# EAGLE board Production (EAGLE 6.5.0)
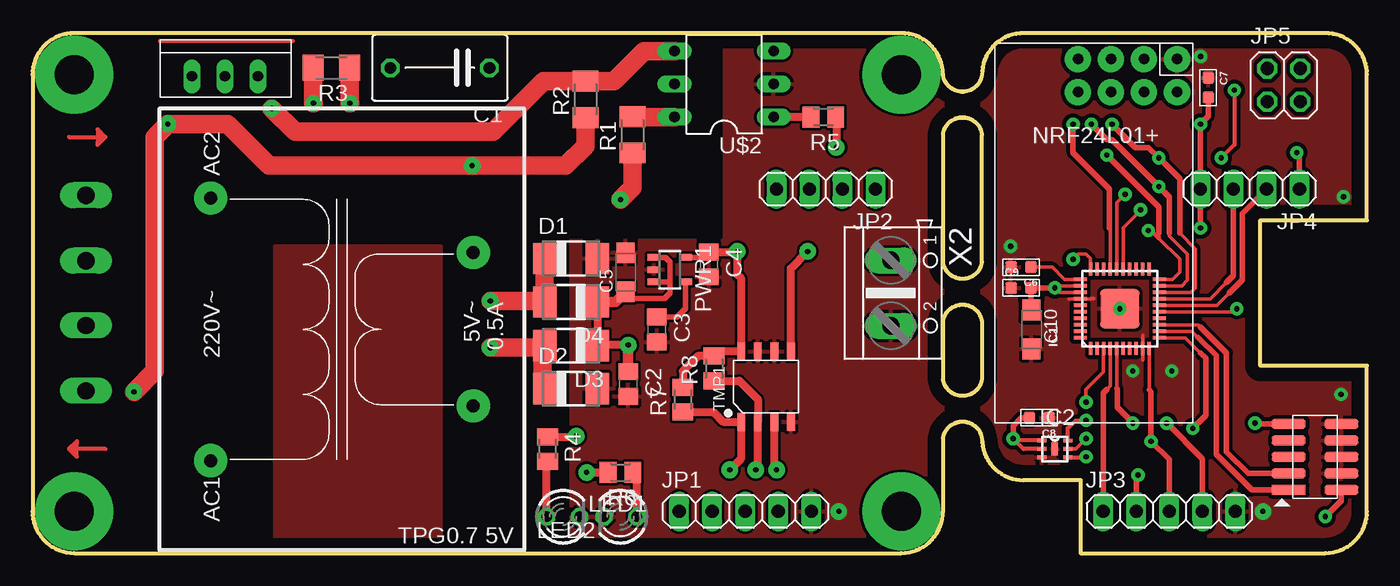
[diagram p0: board, top side]
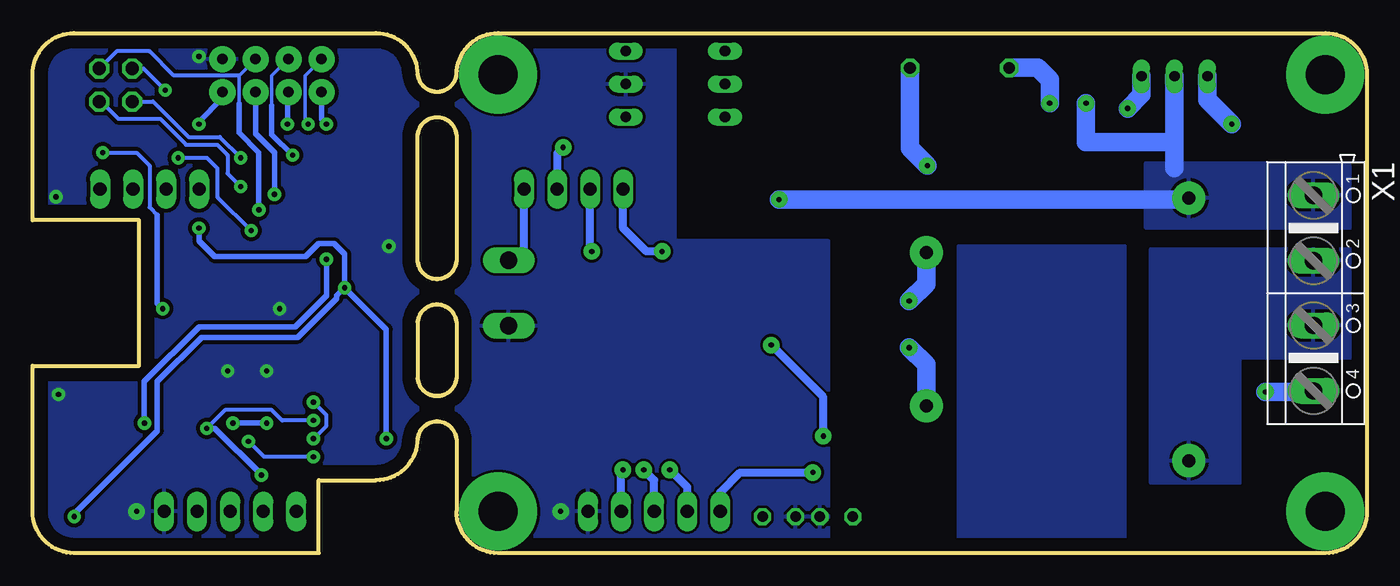
[diagram p1: board, bottom side, seen from below]

Size 102.6 x 40 mm. Coordinates in mm from the lower left corner, seen from the top.
Outline: 3.2,0 66.8,0 arc90 70,3.2 70,8.8 arc-165 73,8.8 arc90 76.2,5.6 80.6,5.6 80.6,0 99.4,0 arc90 102.6,3.2 102.6,14.4 94.4,14.4 94.4,25.6 102.6,25.6 102.6,36.8 arc90 99.4,40 76.2,40 arc90 73,36.8 arc-165 70,36.8 arc90 66.8,40 3.2,40 arc90 0,36.8 0,3.2 arc90 3.2,0
Outline: 70,17.8 arc-165 73,17.8 73,13.4 arc-165 70,13.4 70,17.8
Outline: 73,22.4 arc-165 70,22.4 70,32.2 arc-165 73,32.2 73,22.4
Copper layers (1*16): Top 0.035mm / dielectric 1.5mm / Bottom 0.035mm
Design rules "default": minimum track width 10mil, minimum drill 24mil, track to track 8mil, track to pad 8mil, pad to pad 8mil, via to via 8mil, smd to smd 8mil, copper to edge 40mil, drill to drill 8mil, minimum pad ring 10mil, minimum via ring 8mil, stop-mask expansion 4mil, vias tented up to drill 0mil, thermal gap 10mil

## Footprints (pad centres in the part's own frame; a part is rotated, then mirrored left to right if it is on the bottom)
C075-052X106 = drill 0.914 octagon: 1 -3.81,0; 2 3.81,0
C0805 = smd 1.3 x 1.5: 1 -0.95,0; 2 0.95,0
SMC_A = smd 1.6 x 1.4: + -1.5,0; - 1.5,0
C0603 = smd 0.889 x 0.889: 1 0,0.762; 2 0,-0.762
DO-214AC = smd 1.8 x 2.4: A 2.025,0; C -2.025,0
QFN40-LONG = smd 1 x 0.26: 1 -3.05,2.25; 2 -3.05,1.75; 3 -3.05,1.25; 4 -3.05,0.75; 5 -3.05,0.25; 6 -3.05,-0.25; 7 -3.05,-0.75; 8 -3.05,-1.25; 9 -3.05,-1.75; 10 -3.05,-2.25; 21 3.05,-2.25; 22 3.05,-1.75; 23 3.05,-1.25; 24 3.05,-0.75; 25 3.05,-0.25; 26 3.05,0.25; 27 3.05,0.75; 28 3.05,1.25; 29 3.05,1.75; 30 3.05,2.25 | smd 0.26 x 1: 11 -2.25,-3.05; 12 -1.75,-3.05; 13 -1.25,-3.05; 14 -0.75,-3.05; 15 -0.25,-3.05; 16 0.25,-3.05; 17 0.75,-3.05; 18 1.25,-3.05; 19 1.75,-3.05; 20 2.25,-3.05; 31 2.25,3.05; 32 1.75,3.05; 33 1.25,3.05; 34 0.75,3.05; 35 0.25,3.05; 36 -0.25,3.05; 37 -0.75,3.05; 38 -1.25,3.05; 39 -1.75,3.05; 40 -2.25,3.05 | smd 3 x 3: 41 0,0
USON6 = smd 0.7 x 0.3: 1 -1,0.65; 2 -1,0; 3 -1,-0.65; 4 1,-0.65; 5 1,0; 6 1,0.65 | smd 0.5 x 1: EPAD 0,0
H2X5-SMD-1.27 = smd 0.74 x 2.6: 1 -2.54,2.025; 2 -2.54,-2.025; 3 -1.27,2.025; 4 -1.27,-2.025; 5 0,2.025; 6 0,-2.025; 7 1.27,2.025; 8 1.27,-2.025; 9 2.54,2.025; 10 2.54,-2.025
1X05 = drill 1.016 long: 1 -5.08,0; 2 -2.54,0; 3 0,0; 4 2.54,0; 5 5.08,0
1X04 = drill 1.016 long: 1 -3.81,0; 2 -1.27,0; 3 1.27,0; 4 3.81,0
2X02 = drill 1.016 octagon: 1 -1.27,-1.27; 2 -1.27,1.27; 3 1.27,-1.27; 4 1.27,1.27
LED3MM = drill 0.813 octagon: A -1.27,0; K 1.27,0
SOT23-5 = smd 0.5 x 1: 1 -0.95,-1.2; 2 0,-1.2; 3 0.95,-1.2; 4 0.95,1.2; 5 -0.95,1.2
M1206 = smd 1.6 x 2: 1 -1.4,0; 2 1.4,0
M0805 = smd 1.3 x 1.6: 1 -0.95,0; 2 0.95,0
SOIC8-1.27-5X4MM = smd 0.6 x 1.4: 1 -1.905,-2.7; 2 -0.635,-2.7; 3 0.635,-2.7; 4 1.905,-2.7; 5 1.905,2.7; 6 0.635,2.7; 7 -0.635,2.7; 8 -1.905,2.7
TPG-0.7-5V = drill 1 pad 2.54: AC1 6.9,-3.9; AC2 27.1,-3.9; DC1 11.1,-24.1; DC2 22.9,-24.1
DIL06 = drill 0.813 long: 1 -2.54,-3.81; 2 0,-3.81; 3 2.54,-3.81; 4 2.54,3.81; 5 0,3.81; 6 -2.54,3.81
TO220NORM = drill 0.8 long: GATE 2.54,0; MT1 -2.54,0; MT2 0,0
NRF = drill 0.8 pad 2: CE 3.74,1.2; CSN 3.74,3.74; GND 1.2,1.2; IRQ 8.82,3.74; MISO 8.82,1.2; MOSI 6.28,3.74; SCK 6.28,1.2; VCC 1.2,3.74
AK500/4 = drill 1.321 long: 1 -7.518,0; 2 -2.489,0; 3 2.489,0; 4 7.518,0
AK500/2 = drill 1.321 long: 1 -2.515,0; 2 2.515,0

## Placement (x,y rotation side)
C1  [C075-052X106]  31.32,37.32 180 top
C2  [C0805]  45.8,13 270 top
C3  [C0805]  48,17.2 270 top
C4  [C0805]  52,22.2 270 top
C5  [SMC_A]  45.6,21.6 90 top
C6  [C0603]  76,22 270 top
C7  [C0603]  90.4,35.8 0 top
C8  [C0603]  77.4,10.4 270 top
C9  [C0603]  76,20.4 90 top
C10  [SMC_A]  76.8,17.2 270 top
D1  [DO-214AC]  41.4,22.65 0 top
D2  [DO-214AC]  41.4,12.65 0 top
D3  [DO-214AC]  41.4,15.95 180 top
D4  [DO-214AC]  41.4,19.32 180 top
IC1  CY8C4245-LQI-LONG  [QFN40-LONG]  83.6,18.8 90 top
IC2  OPT3001  [USON6]  78.6,8 0 top
J1  2x5p-1.27  [H2X5-SMD-1.27]  98.6,7.4 90 top
JP1  [1X05]  54.8,3.2 0 top
JP2  [1X04]  61,28 180 top
JP3  [1X05]  87.4,3.2 0 top
JP4  [1X04]  93.6,28 180 top
JP5  [2X02]  96.2,36 0 top
LED1  [LED3MM]  40.8,2.8 0 top
LED2  [LED3MM]  45.2,2.8 180 top
PWR1  LP2992  [SOT23-5]  49,21.8 270 top
R1  [M1206]  46.12,32.18 90 top
R2  [M1206]  42.52,34.9 90 top
R3  [M1206]  22.98,37.32 180 top
R4  [M0805]  39.6,8 270 top
R5  [M0805]  60.8,33.54 180 top
R6  [M0805]  45.2,6.2 180 top
R7  [M0805]  50,11.8 90 top
R8  [M0805]  52.4,14.2 90 top
TMP1  LM92  [SOIC8-1.27-5X4MM]  56.4,12.8 0 top
U$1  ТПГ-0.7-5V  [TPG-0.7-5V]  9.79,0.21 90 top
U$2  MOC3043  [DIL06]  53.17,36.08 90 top
U$3  BTB16  [TO220NORM]  14.8,36.68 0 top
U$4  NRF24  [NRF]  89.2,39.2 180 top
X1  [AK500/4]  4.11,20 270 bottom
X2  [AK500/2]  65.99,20 270 top

## Library data of the parts
C1-C5 C10 R1-R8 = rcl
C6-C9 = My_RLC
D1-D4 = diode
IC1 = PsoC
IC2 PWR1 TMP1 = My_TI
J1 = Seeed-OPL-Connector; MPN: F243-1109A0BMUB2
JP1-JP5 = pinhead
LED1 LED2 = led
U$1 = Trasformators
U$2 = OpticalSwitch
U$3 = Semistors
U$4 = NRF24l01+
X1 X2 = con-ptr500; OC_FARNELL: unknown; OC_NEWARK: unknown

## Nets
+5V: C4.1 JP2.4 PWR1.5 R7.2 R8.2 TMP1.8
+5V1: C7.2 C8.2 C9.2 C10.+ IC1.32 IC1.33 IC2.1 IC2.2 J1.2 JP4.4 U$4.VCC
BUTTON: IC1.15 JP4.1
CE: IC1.25 JP5.4 U$4.CE
CRIT_TEMP: IC1.5 JP3.4
CSN: IC1.26 U$4.CSN
GND: C2.2 C3.2 C4.2 C5.- D1.A D2.A JP1.5 LED1.K LED2.K PWR1.2 TMP1.4 TMP1.6 TMP1.7 U$2.2 X2.2
GND1: C6.2 C7.1 C8.1 C9.1 C10.- IC1.9 IC1.34 IC1.41 IC2.3 IC2.EPAD J1.4 J1.6 J1.8 J1.10 JP3.5 U$4.GND
IRQ: IC1.27 U$4.IRQ
LED: IC1.4 JP3.1
LOAD: JP2.2 R5.1
LOAD1: IC1.16 JP4.2
MOSI: IC1.18 JP5.1 U$4.MOSI
N$1: U$1.AC1 X1.2 X1.3
N$2: R1.1 R3.2 U$1.AC2 U$3.MT2 X1.1
N$3: D1.C D4.A U$1.DC2
N$4: D2.C D3.A U$1.DC1
N$8: R1.2 U$2.6
N$9: R2.2 U$2.4 U$3.GATE
N$10: C1.1 R2.1 U$3.MT1 X1.4
N$11: C1.2 R3.1
N$13: LED1.A R4.2
N$14: R5.2 U$2.1
N$16: C3.1 PWR1.4
N$17: JP1.1 R6.2
N$18: LED2.A R6.1
N$19: JP1.2 R7.1 TMP1.1
N$20: JP1.3 R8.1 TMP1.2
N$21: JP1.4 TMP1.3
N$23: JP2.1 X2.1
N$24: C6.1 IC1.31
N$25: IC1.12 J1.1
N$26: IC1.13 J1.3
NISO: IC1.19 JP5.3 U$4.MISO
OPT_IRQ: IC1.3 IC2.5
RESET: IC1.30 J1.9
SCL: IC1.10 IC2.4 JP3.3
SCLK: IC1.20 JP5.2 U$4.SCK
SDA: IC1.11 IC2.6 JP3.2
TEMP_INT: JP2.3 TMP1.5
TEMP_INT1: IC1.17 JP4.3
VCC: C2.1 C5.+ D3.C D4.C PWR1.1 PWR1.3 R4.1

## Tracks (layer width: path | path; a pad name or v marks a point on that pad's centre or on a via)
+5V  (via drill 0.4 pad 1.27)
  Top 0.406: PWR1.5 51.6,22.75 C4.1
  Top 0.61: C4.1 54.15,23.15 v54.2,23.2 54.2,21.4 54.49,21.11 TMP1.8 52.75,15.5 R8.2 51.15,15.15 50,14 R7.2
  Bottom 0.61: v54.2,23.2 55.4,23.2 57.19,24.99 JP2.4
+5V1  (via drill 0.4 pad 1.02)
  Top 0.254: IC1.32 78.75,20.55 v78.6,20.4 78.95,20.05 IC1.33
  Top 0.305: IC2.1 75.55,8.65 v75.4,8.8 76.2,8 IC2.2
  Top 0.406: 100.6,4.83 J1.2 100.62,4.03 v99.4,2.8 | v89.8,25 v89.79,25.01 JP4.4 v89.8,33 90.4,33.6 C7.2 | v78.6,20.4 C9.2 76.76,18.74 C10.+ | C8.2 76,10.4 75.4,9.8 v75.4,8.8
  Bottom 0.406: v75.4,8.8 75.4,17.2 v78.6,20.4 | v78.6,20.4 78.6,23 79.4,23.8 80.6,23.8 81.6,22.8 88.6,22.8 89.8,24 v89.8,25 | v99.4,2.8 99.4,3 93,9.4 93,13.2 89.6,16.6 82.2,16.6 79.2,19.6 79.2,19.8 v78.6,20.4 | U$4.VCC 88,35 89.8,33.2 v89.8,33
BUTTON  (via drill 0.4 pad 1.02)
  Top 0.254: v92.6,18.8 92.35,18.55 IC1.15
  Top 0.406: JP4.1 97.41,30.59 v97.2,30.8
  Bottom 0.305: v97.2,30.8 94.6,30.8 93.6,29.8 93.6,26.6 93,26
  Bottom 0.406: 93,26 93,19.2 v92.6,18.8
CE  (via drill 0.4 pad 1.02)
  Top 0.254: IC1.25 83.85,25.05 v85.2,26.4
  Bottom 0.254: 86.73,34.55 86.73,36.73 U$4.CE
  Bottom 0.305: 86.73,36.73 91.73,36.73 93.6,38.6 96.14,38.6 JP5.4
  Bottom 0.406: v85.2,26.4 85.2,30.8 86.73,32.33 86.73,34.55
CRIT_TEMP  (via drill 0.4 pad 1.02)
  Top 0.254: 83.35,12.65 IC1.5
  Top 0.406: JP3.4 89.94,7.26 v87.2,10 | v84.6,10 83.4,11.2 83.4,12.6 83.35,12.65
  Bottom 0.406: v87.2,10 v84.6,10
CSN  (via drill 0.4 pad 1.02)
  Top 0.254: IC1.26 83.35,26.95 v84,27.6
  Bottom 0.406: v84,27.6 84,30.8 85.46,32.26 U$4.CSN
GND  (via drill 0.4 pad 1.27)
  other vias: 62,3.2
  pour Top: 70,0 70,40 53.2,40 53.2,24 41.4,24 41.4,0
  pour Bottom: 41.4,0 41.4,24 53.2,24 53.2,40 70,40 70,0
GND1  (via drill 0.4 pad 1.02, 0.4 pad 1.27)
  Top 0.254: 79.68,19.55 IC1.34 81.32,19.55 81.37,19.6 81.6,19.6 | 85.35,14.85 85.35,15.72 IC1.9 85.35,16.72
  other vias: 94.6,3.2 83.6,18.8 75.2,23.6 89.8,38.2 87.6,14 84.6,14 100.6,12.2 100.8,27.4
  pour Top (isolate 0.305): 102.6,0 102.6,40 73,40 73,0
  pour Bottom (isolate 0.305): 73,0 73,40 102.6,40 102.6,0
IRQ  (via drill 0.4 pad 1.02)
  Top 0.254: IC1.27 82.85,24.95 82.8,25
  Top 0.406: 82.8,25 82.8,28 80,30.8 v80,33
  Bottom 0.406: v80,33 80.38,33.38 U$4.IRQ
LED
  Top 0.254: 82.6,12.6 82.85,12.85 IC1.4
  Top 0.406: JP3.1 82.32,12.32 82.6,12.6
LOAD  (via drill 0.4 pad 1.27)
  Top 0.61: R5.1 61.8,33.49 v61.8,31.2
  Bottom 0.61: v61.8,31.2 62.27,30.73 JP2.2
LOAD1
  Top 0.254: IC1.16 91.05,19.05 92,20
  Top 0.406: 92,20 93,21 93,26.13 JP4.2
MOSI  (via drill 0.4 pad 1.02)
  Top 0.254: IC1.18 89.05,20.05 89.4,20.4 89.4,23.4 88.2,24.6
  Top 0.406: 88.2,24.6 88.2,28.8 v86.6,30.4 85.8,31.2 84.8,31.2 v83,33
  Bottom 0.305: JP5.1 93.33,34.73 90.6,32 88.2,32 v86.6,30.4
  Bottom 0.406: v83,33 83,35.38 U$4.MOSI
N$1
  pour Bottom: 0,23.4 0,15 9.8,15 9.8,5.4 16.6,5.4 16.6,23.4
N$2  (via drill 0.4 pad 1.27)
  Top 1.422: R3.2 21.58,34.62 v21.6,34.6 | R1.1 46.12,28.12 v45.2,27.2
  Bottom 1.422: U$3.MT2 14.8,31.4 | 14.8,31.4 14.8,29.6 | v21.6,34.6 21.6,31.6 15,31.6 14.8,31.4 | v45.2,27.2 13.8,27.2 U$1.AC2
  pour Bottom: 0,30 0,25 17,25 17,30
N$3  (via drill 0.4 pad 1.27)
  Top 1.422: v35.2,19.4 39.3,19.4 D4.A D1.C
  Bottom 1.422: U$1.DC2 33.89,20.71 v35.2,19.4
N$4  (via drill 0.4 pad 1.27)
  Top 1.422: v35.2,15.8 39.23,15.8 | 39.23,15.8 D3.A | 39.23,15.8 39.23,12.8 D2.C
  Bottom 1.422: U$1.DC1 33.89,14.49 v35.2,15.8
N$5  (via drill 3 pad 6)
  other vias: 3.2,36.8
N$6  (via drill 3 pad 6)
  other vias: 3.2,3.2
N$7  (via drill 3 pad 6)
  other vias: 66.8,36.8
N$8
  Top 1.422: U$2.6 46.16,33.54 R1.2
N$9  (via drill 0.4 pad 1.27)
  Top 1.422: v18.4,34.2 20.2,32.4 35.4,32.4 39.3,36.3 R2.2 44.7,36.3 47.02,38.62 U$2.4
  Bottom 1.422: U$3.GATE 17.34,35.26 v18.4,34.2
N$10  (via drill 0.4 pad 1.27)
  Top 1.422: v7.8,12.4 9.4,14 9.4,32 v10.4,33 15,33 18.2,29.8 v33.8,29.8 41,29.8 42.52,31.32 R2.1
  Bottom 1.422: U$3.MT1 12.26,34.86 v10.4,33 | v7.8,12.4 4.19,12.4 X1.4 | C1.1 35.13,31.13 v33.8,29.8
N$11  (via drill 0.4 pad 1.27)
  Top 1.422: R3.1 24.38,34.62 v24.4,34.6
  Bottom 1.422: v24.4,34.6 24.4,36.4 25.32,37.32 C1.2
N$12  (via drill 3 pad 6)
  other vias: 66.8,3.2
N$13
  Top 0.61: LED1.A 39.53,6.98 R4.2
N$14
  Top 0.61: R5.2 U$2.1
N$15
  pour Top: 18.6,23.6 31.4,23.6 31.4,0.2 18.6,0.2
  pour Bottom: 31.4,23.6 18.6,23.6 18.6,0.2 31.4,0.2
N$16
  Top 0.406: PWR1.4 50.2,18.8 49.55,18.15 C3.1
N$17  (via drill 0.4 pad 1.27)
  Top 0.61: v42.6,6.2 R6.2
  Bottom 0.61: JP1.1 49.72,4.68 48.2,6.2 v42.6,6.2
N$18
  Top 0.61: LED2.A 46.47,5.88 R6.1
N$19  (via drill 0.4 pad 1.27)
  Top 0.61: v53.6,6.4 54.49,7.29 TMP1.1 53.1,10.1 52.35,10.85 R7.1
  Bottom 0.61: JP1.2 52.26,5.06 v53.6,6.4
N$20  (via drill 0.4 pad 1.27)
  Top 0.61: v55.6,6.4 55.77,6.57 TMP1.2 55.77,11.84 54.35,13.25 R8.1
  Bottom 0.61: JP1.3 54.8,5.6 v55.6,6.4
N$21  (via drill 0.4 pad 1.27)
  Top 0.61: v57.2,6.4 57.03,6.57 TMP1.3
  Bottom 0.61: JP1.4 57.34,6.26 v57.2,6.4
N$22
  Top 0.305: 9.8,39.4 20,39.4
N$23
  Bottom 0.61: X2.1 64.89,22.52 64.8,22.6 JP2.1
N$24
  Top 0.254: IC1.31 79.35,21.05 78.4,22 C6.1
N$25
  Top 0.254: 89.6,16.6 89.15,17.05 IC1.12
  Top 0.406: J1.1 93.74,4.86 91,7.6 91,15.2 89.6,16.6
N$26
  Top 0.254: 89.8,17.4 89.65,17.55 IC1.13
  Top 0.406: J1.3 93.47,6.13 91.8,7.8 91.8,15.4 89.8,17.4
NISO  (via drill 0.4 pad 1.02)
  Top 0.254: IC1.19 88.35,20.55 88.8,21 88.8,23 87.4,24.4 87.4,24.6
  Top 0.406: 87.4,24.6 87.4,27.4 v86.6,28.2 83,31.8 82.6,31.8 v81.4,33
  Bottom 0.254: U$4.MISO 81.65,36.73 81.65,33.25 v81.4,33
  Bottom 0.305: JP5.3 97.33,34.73 96,33.4 92.8,33.4 90.8,31.4 88.4,31.4 87.6,30.6 87.6,29.2 v86.6,28.2
OPT_IRQ  (via drill 0.4 pad 1.02)
  Top 0.254: IC1.3 82.35,13.95 81,12.6 v81,11.6 | IC2.5 80.2,8 v81,8.8
  Bottom 0.305: v81,8.8 80,9.8 80,10.6 v81,11.6
RESET  (via drill 0.4 pad 1.02)
  Top 0.254: IC1.30 81.35,22.65 81,23 80.4,23 v80,22.6
  Top 0.406: J1.9 94.06,9.94 v94,10
  Bottom 0.406: v80,22.6 80,19.8 82.4,17.4 89.8,17.4 94,13.2 v94,10
S$1
  Top 0.305: 2.8,32 5.6,32 | 5.6,32 5,31.4 5,31.6 | 5.6,32 5,32.6 5,31.6 | 5,31.6 5.2,31.8 5.2,32.2
S$2
  Top 0.305: 5.6,8 2.8,8 | 2.8,8 3.4,8.6 3.4,8.4 | 2.8,8 3.4,7.4 3.4,8.4 | 3.4,8.4 3.2,8.2 3.2,7.8
SCL  (via drill 0.4 pad 1.02)
  Top 0.254: 85.85,12.55 IC1.10
  Top 0.305: IC2.4 80.95,7.35 v81,7.4
  Top 0.406: JP3.3 87.4,7.2 v86,8.6 86,12.4 85.85,12.55
  Bottom 0.305: v81,7.4 84.8,7.4 v86,8.6
SCLK  (via drill 0.4 pad 1.02)
  Top 0.254: IC1.20 87.65,21.05 88.2,21.6 88.2,22.6 86.6,24.2 86.6,24.6
  Top 0.305: v92.4,35.6 92.4,31.4 v91.4,30.4 | v85.8,24.8 86,24.8 86.6,24.2
  Top 0.406: 86.6,24.6 86.6,26.6 v82.6,30.6
  Bottom 0.254: 84.2,34.4 84.2,36.72 U$4.SCK
  Bottom 0.305: JP5.2 94.07,37.27 v92.4,35.6 | v91.4,30.4 89.2,30.4 88.4,29.6 88.4,27.4 v85.8,24.8
  Bottom 0.406: v82.6,30.6 84.2,32.2 84.2,34.4
SDA  (via drill 0.4 pad 1.02)
  Top 0.254: IC1.11 88.65,16.55 89.8,15.4
  Top 0.305: IC2.6 79.6,9.6 80.2,10.2 v81,10.2
  Top 0.406: 89.8,15.4 90.2,15 90.2,10.6 v89.2,9.6 | v85,6 84.86,5.86 JP3.2
  Bottom 0.305: v81,10.2 83.4,10.2 84.2,11 87.8,11 v89.2,9.6
  Bottom 0.406: v89.2,9.6 88.6,9.6 v85,6
TEMP_INT  (via drill 0.4 pad 1.27)
  Top 0.61: TMP1.5 58.3,21.91 v59.6,23.2
  Bottom 0.61: v59.6,23.2 59.73,23.33 JP2.3
TEMP_INT1
  Top 0.254: IC1.17 90.55,19.55 91.8,20.8
  Top 0.406: 91.8,20.8 92.33,21.33 JP4.3
VCC  (via drill 0.4 pad 1.27)
  Top 0.406: PWR1.1 48.65,22.75 49,22.4 49,21 | 49,21 49,20 48.6,19.6 46.1,19.6 C5.+ | PWR1.3 48.85,20.85 49,21
  Top 0.61: D4.C D3.C 43.48,16 v45.8,16 | R4.1 41.75,8.95 v41.8,9
  Top 0.813: C2.1 v45.8,16 | D4.C 44.82,19.32 C5.+
  Bottom 0.61: v41.8,9 41.8,12 v45.8,16